# Altium PCB PCB.PcbDoc
Units mil, origin at the board's own origin, x right, y up, seen from the top; angles counter-clockwise.
Board outline 2598.43 x 1988.19 mil, 2 copper layers (Top Layer, Bottom Layer); 24 components, 43 nets, 128 pads, 15 vias.
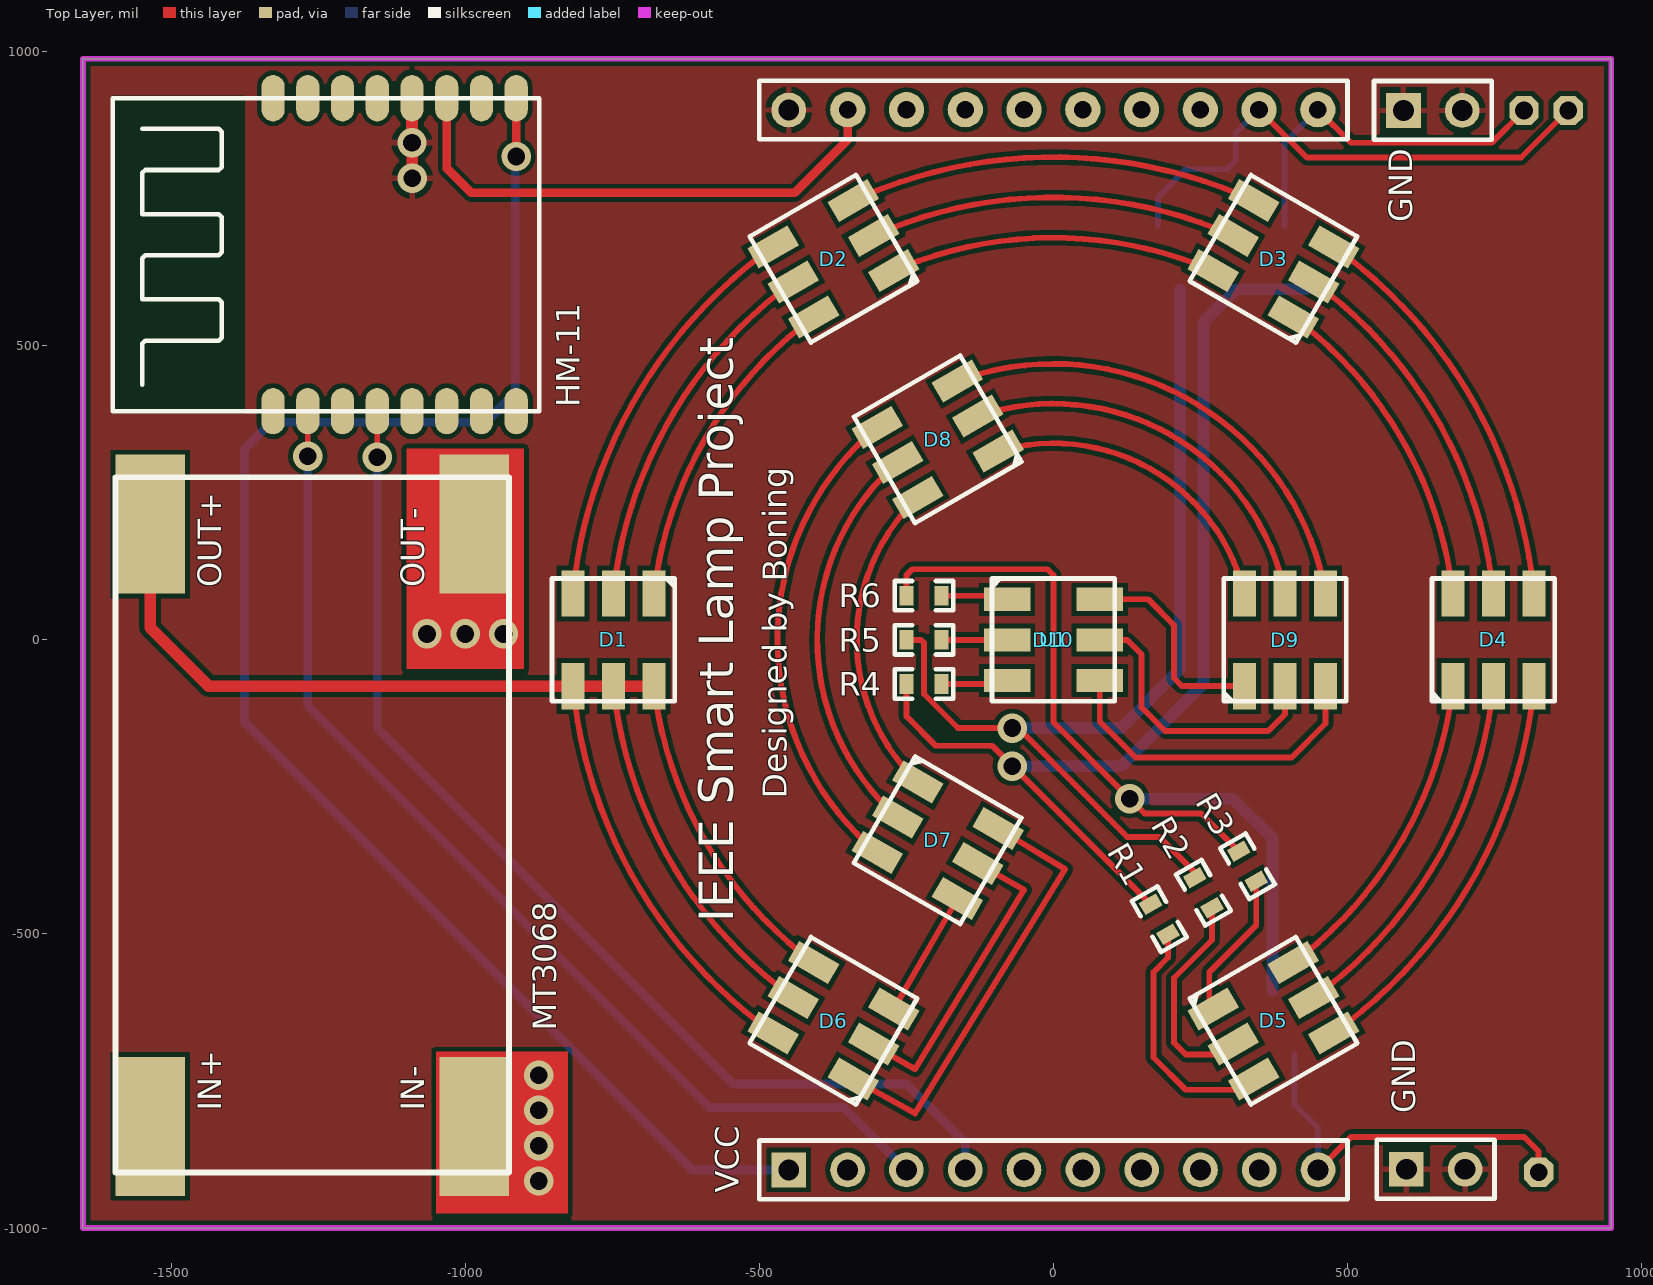
[diagram p0: Top Layer view]
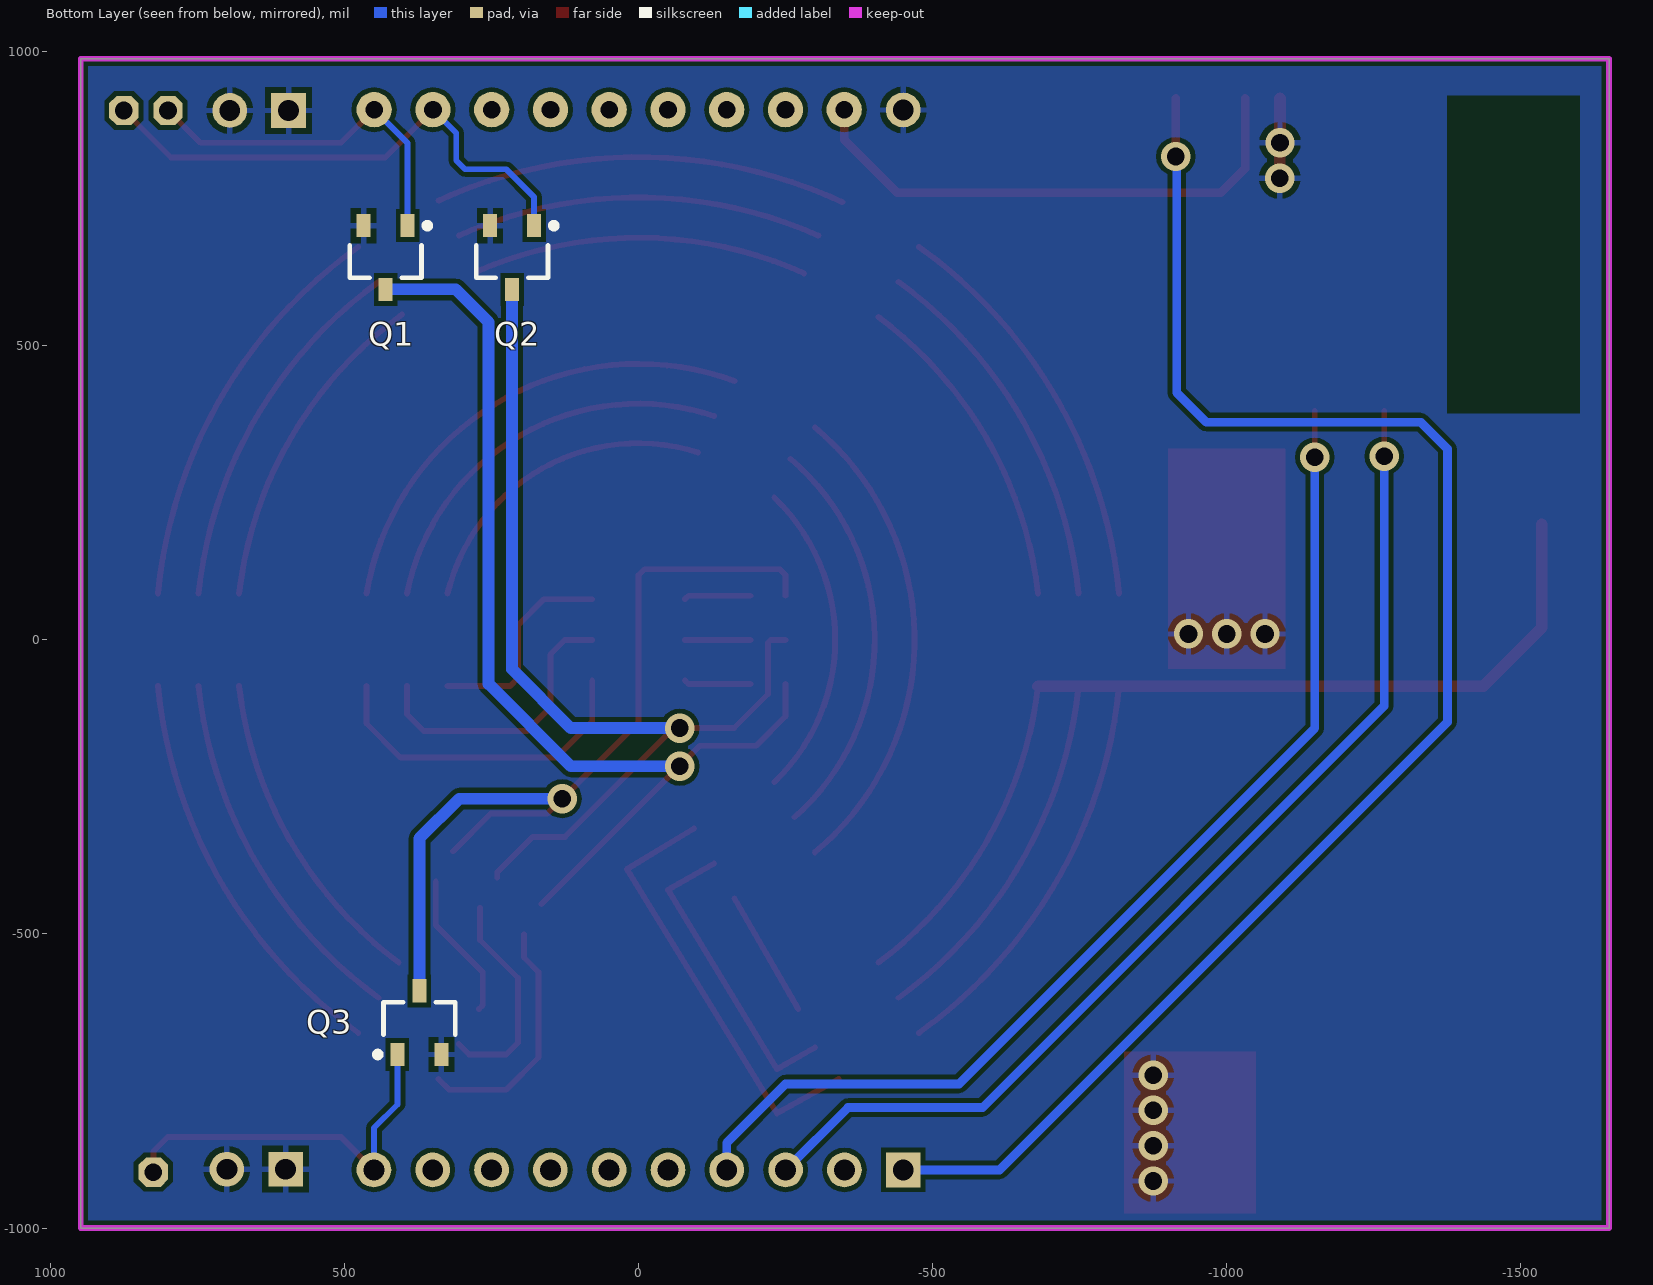
[diagram p1: Bottom Layer view, seen from below]

## Layer stack, top to bottom
Top Solder: solder mask 0.4, Solder Resist, Dk 3.5
Top Layer: signal copper 1.4
Dielectric 1: dielectric 12.6, FR-4, Dk 4.8
Bottom Layer: signal copper 1.4
Bottom Solder: solder mask 0.4, Solder Resist, Dk 3.5

## Board outline
-1650,-1000.24 948.43,-1000.24 948.43,987.95 -1650,987.95

## Design rules (kind name [scope] priority, off if disabled: settings)
Clearance [All] p1: gap=7.87
ComponentClearance [InComponent('No Component') vs InComponent('No Component')] p1: gap=10 collisioncheckmode=3 verticalgap=10 showdistances=FALSE
PolygonConnect [All] p1: connectstyle=Relief reliefconductorwidth=10 reliefentries=4 polygonreliefangle="90 Angle" airgapwidth=10
RoutingVias [All] p1: holewidth=23.62 width=39.37 viastyle="Through Hole" minholewidth=28 minwidth=50 maxholewidth=28 maxwidth=50
SolderMaskExpansion [All] p1: expansion=4
Width [All] p1: maxlimit=50 minlimit=10 preferedwidth=20
29 further rules are at their usual default settings.

## Components (designator, comment, footprint, x,y, rotation, side; value= is the part's Value field where it differs from the comment)
D1 "RGB_LED" LED5050 -748.03,0 r90 top
D2 "RGB_LED" LED5050 -374.02,647.81 r30 top
D3 "RGB_LED" LED5050 374.02,647.81 r330 top
D4 "RGB_LED" LED5050 748.03,0 r270 top
D5 "RGB_LED" LED5050 374.02,-647.81 r210 top
D6 "RGB_LED" LED5050 -374.02,-647.81 r330 top
D7 "RGB_LED" LED5050 -196.85,-340.95 r150 top
D8 "RGB_LED" LED5050 -196.85,340.95 r30 top
D9 "RGB_LED" LED5050 393.7,0 r270 top
D10 "RGB_LED" LED5050 0,0 r180 top
GND "Header 2" HDR1X2 600,-900 r0 top (schematic designator P1)
GND "Header 2" HDR1X2 595,900 r0 top (schematic designator P2)
HM-11 "HM-17" HM_05_06_07_11_13_17 -1120,654.76 r90 top locked
MT3068 "MT3068" MT3068-usb -1260,-315.24 r90 top (schematic designator U2)
Q1 "AO3400" SOT23 430,650 r270 bottom
Q2 "AO3400" SOT23 215,650 r270 bottom
Q3 "AO3400" SOT23 372.6,-650.87 r90 bottom
R1 "0603" D0603 180,-475 r120 top
R2 "0603" D0603 255,-430 r120 top
R3 "0603" D0603 330,-385 r120 top
R4 "0603" D0603 -220,-75 r180 top
R5 "0603" D0603 -220,0 r180 top
R6 "0603" D0603 -220,75 r180 top
U1 "MSP-EXP430" MSP-EXP430 0,0.01 r0 top locked

## Footprints (in the part's own frame and the unit in brackets; to place one, negate y for a bottom-side part, rotate by r counter-clockwise, add the part's x,y. Pads: shape width x height; smd on the part's side, far side on the other; paste and mask are expansions set on the pad)
D0603 [mm] "D0603"
  rect 0.6x0.85 smd: 1(-0.75,0) 2(0.75,0)
  silkscreen extent -1.27,-0.63 1.27,0.63, body extent -0.8,-0.4 0.8,0.4, height 0.5
HDR1X2 [mm] "Connector; Header; 2 Position"
  rect 1.5x1.5 hole 0.9: 1(0,0)
  round 1.5 hole 0.9: 2(2.54,0)
  silkscreen extent -1.27,-1.27 3.81,1.27
HM_05_06_07_11_13_17 [mm]
  oval 2x1 smd: 1(-6.756,5.25) 2(-6.756,3.75) 3(-6.756,2.25) 4(-6.756,0.75) 5(-6.756,-0.75) 6(-6.756,-2.25) 7(-6.756,-3.75) 8(-6.756,-5.25) 9(6.756,-5.25) 10(6.756,-3.75) 11(6.756,-2.25) 12(6.756,-0.75) 13(6.756,0.75) 14(6.756,2.25) 15(6.756,3.75) 16(6.756,5.25)
  silkscreen extent -6.76,-6.25 6.76,12.17
LED5050 [mm] "LED5050"
  rect 2x1 smd mask+0.05: 1(-2,1.75) 2(-2,0) 3(-2,-1.75) 4(2,-1.75) 5(2,0) 6(2,1.75)
  silkscreen extent -2.65,-2.65 2.65,2.65, body extent -2.5,-2.5 2.5,2.5, height 1.6
MSP-EXP430 [mm] "MSP-EXP430"
  rect 1.5x1.5 hole 0.9: 1(-11.43,-22.892)
  round 1.5 hole 0.9: 2(-8.89,-22.892) 3(-6.35,-22.892) 4(-3.81,-22.892) 5(-1.27,-22.892) 6(1.27,-22.892) 7(3.81,-22.892) 8(6.35,-22.892) 9(8.89,-22.892) 10(11.43,-22.892) 20(-11.43,22.88)
  round 1.524 hole 0.762: 11(11.418,22.892) 12(8.881,22.892) 13(6.343,22.892) 14(3.806,22.892) 15(1.269,22.892) 16(-1.269,22.892) 17(-3.806,22.892) 18(-6.343,22.892) 19(-8.881,22.892)
  silkscreen extent -12.7,-24.16 12.7,24.15
MT3068-usb [mm] "MT3068 with micro usb"
  rect 6x3 smd: 1(-13,7) 2(-13,-7) 3(13,7) 4(13,-7)
  silkscreen extent -15,-8.5 15.03,8.5, body extent -14.99,-8.51 14.99,8.51, height 4.5
SOT23 [mm] "SOT23, 3-Leads, Body 2.90x2.80mm, Pitch 0.95mm, IPC Medium Density"
  rect 1x0.6 smd: 1(-1.375,0.95) 2(1.375,0) 3(-1.375,-0.95)
  silkscreen extent -1.5,-1.55 0.87,1.92, body extent -0.88,-1.52 0.87,1.53, height 1.45

## Part data
GND GND: "Header, 2-Pin"
MT3068: library part MT3068-USB, "MT3068 Boost converter with micro USB"
Q1 Q2 Q3: library part NMOS, "N-Channel Power MOSFET"
R1 R2 R3 R4 R5 R6: library part Res1, "Resistor"
U1: "MSP-EXP430 Connectors"

## Free pads (board coordinates)
  oct 50x50 hole 30: 0(800,900) 2(825,-905) 2(875,900)

## Via types
v1: diameter 50, hole 30, Top Layer to Bottom Layer, tented both sides, 15 vias

## Nets (pads, with @x,y where several pads share a name; then routed paths per layer and width w, separated by ;. In a path a pad name is that pad's centre, name@x,y a point inside that pad or via, vN(x,y) a via of type N, cw(c..) or ccw(c..) an arc to the next point about the centre after c; other vN are vias at no path point)
3.3V: HM-11.9 U1.1 | length 2703.7
  Top Layer w15: v1(-913.31,821.69) HM-11.9
  Bottom Layer w15: v1@-915,820 -915,420 -965,370 -1330,370 -1375,325 -1375,-140 -613.76,-901.24 U1.1
BLU_RESET: HM-11.11 U1.19 | length 906.6
  Top Layer w15: HM-11.11 -1031.42,801.42 -990,760 -440,760 -349.63,850.37 U1.19
C0: Q1.2 R1.2 R4.2 | length 1798.5
  Top Layer w10: R4.2 -249.53,-130.47 -200,-180 -104.19,-180 R1.2
  Bottom Layer w20: v1(-70,-215) 115,-215 255,-75 255,540 310.87,595.87 Q1.2
C1: Q2.2 R2.2 R5.2 | length 1686
  Top Layer w10: R5.2 -225,0 -220,-5 -220,-92.22 -162.22,-150 v1(-70,-150) -60,-150 125,-335 180,-335 240.24,-395.24 R2.2
  Bottom Layer w20: v1(-70,-150) 115,-150 215,-50 Q2.2
C2: Q3.2 R3.2 R6.2 | length 1478.9
  Top Layer w10: R6.2 -249.53,110.47 -240,120 -10,120 0,110 0,-140 v1(130,-270) 155,-295 250.81,-295 R3.2
  Bottom Layer w20: v1(130,-270) 305,-270 372.6,-337.6 Q3.2
EXT_VCC: MT3068.1
GND: GND.1 GND.2 HM-11.12 MT3068.2 MT3068.4 Q1.3 Q2.3 Q3.3 U1.20 | length 136
  Top Layer w20: HM-11.12 v1(-1090.47,845) -1090,844.53 v1(-1090,785)
  other v1: -875,-920 -875,-860 -875,-800 -875,-740 -1065,10 -1000,10 -935,10
LED0: pad.0 Q1.1 U1.11 | length 617.3
  Top Layer w10: U1.11 505.79,845 745,845 pad.0
  Bottom Layer w10: Q1.1 392.6,844.33 U1.11
LED1: pad.2@875,900 Q2.1 U1.12 | length 901.6
  Top Layer w10: U1.12 430.9,820 795,820 pad.2@875,900
  Bottom Layer w10: Q2.1 177.6,752.6 225,800 295,800 310,815 310,861.63 U1.12
LED2: pad.2@825,-905 Q3.1 U1.10 | length 656.5
  Top Layer w10: U1.10 506.24,-845 800,-845 825,-870 pad.2@825,-905
  Bottom Layer w10: Q3.1 410,-790 450,-830 U1.10
NetD1_4: D1.4 D2.3 | length 558.1
  Top Layer w10: D1.4 cw(c0,0) D2.3
NetD1_5: D1.5 D2.2 | length 629.9
  Top Layer w10: D1.5 cw(c0,0) D2.2
NetD1_6: D1.6 D2.1 | length 701.7
  Top Layer w10: D1.6 cw(c0,0) D2.1
NetD2_4: D2.4 D3.3 | length 569.1
  Top Layer w10: D2.4@-281.39,623.09 cw(c0,0) D3.3
NetD2_5: D2.5 D3.2 | length 629.9
  Top Layer w10: D2.5 cw(c0,0) D3.2
NetD2_6: D2.6 D3.1 | length 708.9
  Top Layer w10: D2.6@-346.79,743.85 cw(c0,0) D3.1
NetD3_4: D3.4 D4.3 | length 565.1
  Top Layer w10: D3.4@402.12,552.92 cw(c0,0) D4.3
NetD3_5: D3.5 D4.2 | length 629.9
  Top Layer w10: D3.5 cw(c0,0) D4.2
NetD3_6: D3.6 D4.1 | length 701.7
  Top Layer w10: D3.6 cw(c0,0) D4.1
NetD4_4: D4.4 D5.3 | length 558.1
  Top Layer w10: D5.3 ccw(c0,0) D4.4
NetD4_5: D4.5 D5.2 | length 629.9
  Top Layer w10: D5.2 ccw(c0,0) D4.5
NetD4_6: D4.6 D5.1 | length 701.7
  Top Layer w10: D5.1 ccw(c0,0) D4.6
NetD5_4: D5.4 R3.1 | length 252.6
  Top Layer w10: D5.4 265,-621.14 265,-565 344.76,-485.24 R3.1
NetD5_5: D5.5 R2.1 | length 372.7
  Top Layer w10: R2.1 269.76,-510.24 205,-575 205,-685 225,-705 288.01,-705 D5.5
NetD5_6: D5.6 R1.1 | length 420.3
  Top Layer w10: R1.1 194.76,-540.24 170,-565 170,-710 225,-765 322.13,-765 D5.6
NetD6_4: D6.4 D7.3 | length 741
  Top Layer w10: D6.4 -235,-805 20,-390 D7.3
NetD6_5: D6.5 D7.2 | length 522
  Top Layer w10: D6.5@-300,-693.01 -235,-730 -50,-425 D7.2
NetD6_6: D6.6 D7.1 | length 216.5
  Top Layer w10: D6.6 D7.1
NetD7_4: D7.4 D8.3 | length 541
  Top Layer w10: D7.4 cw(c0,0) D8.3
NetD7_5: D7.5 D8.2 | length 691.7
  Top Layer w10: D7.5 cw(c0,0) D8.2@-258.01,307.62
NetD7_6: D7.6 D8.1 | length 824.6
  Top Layer w10: D7.6 cw(c0,0) D8.1
NetD8_4: D8.4 D9.3 | length 548.2
  Top Layer w10: D8.4@-101.13,318.54 cw(c0,0) D9.3
NetD8_5: D8.5 D9.2 | length 682.4
  Top Layer w10: D8.5 cw(c0,0) D9.2
NetD8_6: D8.6 D9.1 | length 824.6
  Top Layer w10: D8.6 cw(c0,0) D9.1
NetD9_4: D9.4 D10.3 | length 359.9
  Top Layer w10: D10.3 161.1,68.9 205,25 205,-65 218.74,-78.74 D9.4
NetD9_5: D9.5 D10.2 | length 491.3
  Top Layer w10: D10.2 125,0 150,-25 150,-115 190,-155 365,-155 393.7,-126.3 D9.5
NetD9_6: D9.6 D10.1 | length 566.6
  Top Layer w10: D10.1 78.74,-138.74 140,-200 405,-200 462.6,-142.4 D9.6
NetD10_4: D10.4 R6.1 | length 114.3
  Top Layer w10: R6.1 -84.84,75 D10.4
NetD10_5: D10.5 R5.1 | length 111.7
  Top Layer w10: R5.1 D10.5
NetD10_6: D10.6 R4.1 | length 114.3
  Top Layer w10: R4.1 -84.84,-75 D10.6
RX: HM-11.2 U1.3 | length 1845.5
  Top Layer w10: v1(-1267.64,312.36) HM-11.2
  Bottom Layer w15: v1(-1267.64,312.36) -1267.64,-112.36 -585,-795 -356.24,-795 U1.3
TX: HM-11.4 U1.4 | length 1876.8
  Top Layer w10: v1(-1149.53,310.47) HM-11.4
  Bottom Layer w15: v1(-1149.53,310.47) -1149.53,-150.47 -545,-755 -250,-755 -150,-855 U1.4
VCC: D1.1 D1.2 D1.3 D6.1 D6.2 D6.3 MT3068.3 | length 2963.3
  Top Layer w10: D1.1 ccw(c0,0) D6.3 ; D1.2 ccw(c0,0) D6.2 ; D1.3 ccw(c0,0) D6.1
  Top Layer w20: MT3068.3 -1535.59,20.59 -1436.26,-78.74 D1.1 D1.2 D1.3
pads on no net: HM-11.1 HM-11.3 HM-11.5 HM-11.6 HM-11.7 HM-11.8 HM-11.10 HM-11.13 HM-11.14 HM-11.15 HM-11.16 U1.2 U1.5 U1.6 U1.7 U1.8 U1.9 U1.13 U1.14 U1.15 U1.16 U1.17 U1.18

## Polygon pours and split planes (outlines as drawn)
GND on Top Layer "Top Overlay-No Net" (solid, remove dead copper, pour order 14): -1650,-1000.24 948.43,-1000.24 948.43,987.95 -1650,987.95
GND on Bottom Layer "Top Overlay-No Net" (solid, remove dead copper, pour order 16): -1650,987.95 -1650,-1000.24 948.43,-1000.24 948.43,987.95

## Keep-outs
Keep-Out Layer:
  the board outline again, w10

## Other copper
Top Layer:
  rectangle net GND: -1050,-975 -825,-700
  rectangle net GND: -1100,-50 -900,325
  pour cut-out: -1375,925 -1600,925 -1600,385 -1375,385
Bottom Layer:
  pour cut-out: -1600,925 -1375,925 -1375,385 -1600,385

## Silkscreen, mask and mechanical layers (free items; w line width, h text height)
Top Overlay:
  text "Designed by Boning" at -440,-270 h70 r90
  text "IEEE Smart Lamp Project" at -525,-480 h100 r90
Mechanical 6:
  the board outline again, w10

## Text inside footprints (layer, text, board x,y; h text height)
MT3068: Top Overlay "OUT-" at -1070,89.76 h40 r90; Top Overlay "OUT+" at -1415,89.76 h40 r90; Top Overlay "IN+" at -1415,-800.24 h40 r90; Top Overlay "IN-" at -1070,-800.24 h40 r90
U1: Top Overlay "VCC" at -535,-940 h40 r90